# Altium PCB E-Field-Near-Probe.PcbDoc
Units mil, origin at the board's own origin, x right, y up, seen from the top; angles counter-clockwise.
Board outline 6000 x 4000 mil, 4 copper layers (Top Layer, Layer 1, Layer 2, Bottom Layer), stack 61.811 mil thick; 1 components, 2 nets, 5 pads, 446 vias.
Unrouted connection lines stored in the file: 445.
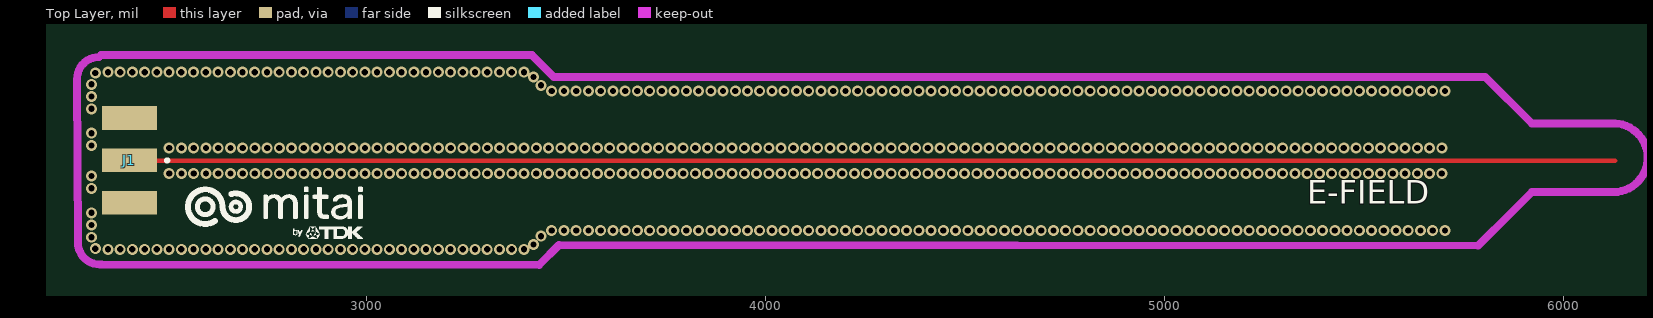
[diagram p0: Top Layer view]
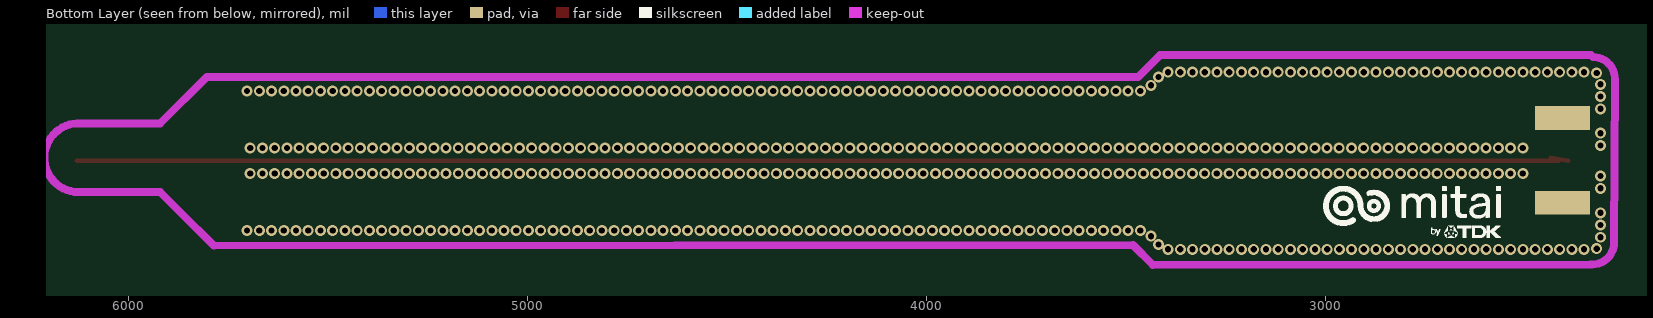
[diagram p1: Bottom Layer view, seen from below]

## Layer stack, top to bottom
Top Solder: solder mask 0.5, Solder Resist, Dk 3.5
Top Layer: signal copper 1.378
Dielectric 2: prepreg 7.874, PP-006, Dk 4.1
Layer 1: signal copper 0.689
Dielectric 1: dielectric 41.9291, FR-4, Dk 4.8
Layer 2: signal copper 0.689
Dielectric 3: prepreg 7.874, PP-006, Dk 4.1
Bottom Layer: signal copper 1.378
Bottom Solder: solder mask 0.5, Solder Resist, Dk 3.5

## Board outline
1000,1000 7000,1000 7000,5000 1000,5000

## Design rules (kind name [scope] priority, off if disabled: settings)
Clearance [All] p1: gap=10 ignorepadtopadclearanceinfootprint=FALSE except(0: Arc-Hole Track-Hole SMDPad-Hole THPad-Hole Via-Hole Fill-Hole Poly-Hole Region-Hole Text-Hole)
PolygonConnect [All] p1: connectstyle=Relief reliefconductorwidth=10 reliefentries=4 polygonreliefangle="90 Angle" airgapwidth=10
RoutingVias [All] p1: holewidth=28 width=50 viastyle="Through Hole" minholewidth=28 minwidth=50 maxholewidth=28 maxwidth=50
SolderMaskExpansion [All] p1: expansion=4 istentingtop=FALSE
Width [All] p1: maxlimit=10 minlimit=10 preferedwidth=10
30 further rules are at their usual default settings.

## Components (designator, comment, footprint, x,y, rotation, side; value= is the part's Value field where it differs from the comment)
J1 "CON-SMA-EDGE-S" RFSOLUTIONS_CON-SMA-EDGE-S 2405,3468.7 r0 top

## Footprints (in the part's own frame and the unit in brackets; to place one, negate y for a bottom-side part, rotate by r counter-clockwise, add the part's x,y. Pads: shape width x height; smd on the part's side, far side on the other; paste and mask are expansions set on the pad)
RFSOLUTIONS_CON-SMA-EDGE-S [mm]
  rect 3.5x1.5 smd: 1(0,0) G1(0,2.7) G2(0,-2.7)
  rect 3.5x1.5 smd far side: G3(0,2.7) G4(0,-2.7)
  silkscreen extent 2.3,-0.1 2.5,0.1, body extent -11.27,-3.17 2.06,3.17, height 3.55

## Part data
J1: "SMA Connector Jack, Female Socket - Board Edge, End Launch Solder", Package=None, Check_prices=https://www.snapeda.com/parts/CON-SMA-EDGE-S/RF+Solutions/view-part/?ref=eda, Digi-Key_Part_Number=CON-SMA-EDGE-S-ND, MF="RF Solutions", MP=CON-SMA-EDGE-S, Purchase-URL=https://pricing.snapeda.com/search/part/CON-SMA-EDGE-S/?ref=eda, SnapEDA_Link=https://www.snapeda.com/parts/CON-SMA-EDGE-S/RF+Solutions/view-part/?ref=snap

## Via types
v1: diameter 27.56, hole 15.75, Top Layer to Bottom Layer, tented both sides, 446 vias

## Nets (pads, with @x,y where several pads share a name; then routed paths per layer and width w, separated by ;. In a path a pad name is that pad's centre, name@x,y a point inside that pad or via, vN(x,y) a via of type N, cw(c..) or ccw(c..) an arc to the next point about the centre after c; other vN are vias at no path point)
GND: J1.G1 J1.G2 J1.G3 J1.G4
  other v1: 2351,3245.84 2381.67,3245.84 2412.33,3245.84 2443,3245.84 2473.66,3245.84 2504.33,3245.84 2535,3245.84 2565.66,3245.84 2596.33,3245.84 2627,3245.84 2657.66,3245.84 2688.33,3245.84 2719,3245.84 2749.66,3245.84 2780.33,3245.84 2811,3245.84 2841.66,3245.84 2872.33,3245.84 2903,3245.84 2933.66,3245.84 2964.33,3245.84 2995,3245.84 3025.66,3245.84 3056.33,3245.84 3087,3245.84 3117.66,3245.84 3148.33,3245.84 3148.33,3245.84 3179,3245.84 3209.66,3245.84 3240.33,3245.84 3271,3245.84 3301.66,3245.84 3332.33,3245.84 3363,3245.84 3393.66,3245.84 2319.48,3247.56 3417.66,3257.84 2309.66,3276.18 3436.66,3278.84 3463.33,3292.84 3494,3292.84 3524.66,3292.84 3555.33,3292.84 3586,3292.84 3616.66,3292.84 3647.33,3292.84 3678,3292.84 3708.66,3292.84 3739.33,3292.84 3770,3292.84 3800.66,3292.84 3831.33,3292.84 3861.99,3292.84 3892.66,3292.84 3923.33,3292.84 3953.99,3292.84 3984.66,3292.84 4015.33,3292.84 4045.99,3292.84 4076.66,3292.84 4107.33,3292.84 4137.99,3292.84 4168.66,3292.84 4199.33,3292.84 4229.99,3292.84 4260.66,3292.84 4291.33,3292.84 4321.99,3292.84 4352.66,3292.84 4383.33,3292.84 4413.99,3292.84 4444.66,3292.84 4475.33,3292.84 4505.99,3292.84 4536.66,3292.84 4567.33,3292.84 4597.99,3292.84 4628.66,3292.84 4659.33,3292.84 4689.99,3292.84 4720.66,3292.84 4751.33,3292.84 4781.99,3292.84 4812.66,3292.84 4843.33,3292.84 4873.99,3292.84 4904.66,3292.84 4935.33,3292.84 4965.99,3292.84 4996.66,3292.84 5027.33,3292.84 5057.99,3292.84 5088.66,3292.84 5119.33,3292.84 5149.99,3292.84 5180.66,3292.84 5211.33,3292.84 5241.99,3292.84 5272.66,3292.84 5303.33,3292.84 5333.99,3292.84 5364.66,3292.84 5395.32,3292.84 5425.99,3292.84 5456.66,3292.84 5487.32,3292.84 5517.99,3292.84 5548.66,3292.84 5579.32,3292.84 5609.99,3292.84 5640.66,3292.84 5671.32,3292.84 5701.99,3292.84 2309.66,3306.84 2309.66,3337.51 2309.66,3398.84 2309.66,3429.51 2504.66,3435.84 2535.33,3435.84 2566,3435.84 2596.66,3435.84 2627.33,3435.84 2658,3435.84 2688.66,3435.84 2719.33,3435.84 2750,3435.84 2780.66,3435.84 2811.33,3435.84 2842,3435.84 2872.66,3435.84 2903.33,3435.84 2934,3435.84 2964.66,3435.84 2995.33,3435.84 3026,3435.84 3056.66,3435.84 3087.33,3435.84 3118,3435.84 3148.66,3435.84 3179.33,3435.84 3210,3435.84 3240.66,3435.84 3271.33,3435.84 3302,3435.84 3332.66,3435.84 3363.33,3435.84 3394,3435.84 3424.66,3435.84 3455.33,3435.84 3486,3435.84 3516.66,3435.84 3547.33,3435.84 3578,3435.84 3608.66,3435.84 3639.33,3435.84 3670,3435.84 3700.66,3435.84 3731.33,3435.84 3762,3435.84 3792.66,3435.84 3823.33,3435.84 3853.99,3435.84 3884.66,3435.84 3915.33,3435.84 3945.99,3435.84 3976.66,3435.84 4007.33,3435.84 4037.99,3435.84 4068.66,3435.84 4099.33,3435.84 4129.99,3435.84 4160.66,3435.84 4191.33,3435.84 4221.99,3435.84 4252.66,3435.84 4283.33,3435.84 4313.99,3435.84 4344.66,3435.84 4375.33,3435.84 4405.99,3435.84 4436.66,3435.84 4467.33,3435.84 4497.99,3435.84 4528.66,3435.84 4559.33,3435.84 4589.99,3435.84 4620.66,3435.84 4651.33,3435.84 4681.99,3435.84 4712.66,3435.84 4743.33,3435.84 4773.99,3435.84 4804.66,3435.84 4835.33,3435.84 4865.99,3435.84 4896.66,3435.84 4927.33,3435.84 4957.99,3435.84 4988.66,3435.84 5019.33,3435.84 5049.99,3435.84 5080.66,3435.84 5111.33,3435.84 5141.99,3435.84 5172.66,3435.84 5203.33,3435.84 5233.99,3435.84 5264.66,3435.84 5295.33,3435.84 5325.99,3435.84 5356.66,3435.84 5387.32,3435.84 5417.99,3435.84 5448.66,3435.84 5479.32,3435.84 5509.99,3435.84 5540.66,3435.84 5571.32,3435.84 5601.99,3435.84 5632.66,3435.84 5663.32,3435.84 5693.99,3435.84 2504.66,3499.84 2535.33,3499.84 2566,3499.84 2596.66,3499.84 2627.33,3499.84 2658,3499.84 2688.66,3499.84 2719.33,3499.84 2750,3499.84 2780.66,3499.84 2811.33,3499.84 2842,3499.84 2872.66,3499.84 2903.33,3499.84 2934,3499.84 2964.66,3499.84 2995.33,3499.84 3026,3499.84 3056.66,3499.84 3087.33,3499.84 3118,3499.84 3148.66,3499.84 3179.33,3499.84 3210,3499.84 3240.66,3499.84 3271.33,3499.84 3302,3499.84 3332.66,3499.84 3363.33,3499.84 3394,3499.84 3424.66,3499.84 3455.33,3499.84 3486,3499.84 3516.66,3499.84 3547.33,3499.84 3578,3499.84 3608.66,3499.84 3639.33,3499.84 3670,3499.84 3700.66,3499.84 3731.33,3499.84 3762,3499.84 3792.66,3499.84 3823.33,3499.84 3853.99,3499.84 3884.66,3499.84 3915.33,3499.84 3945.99,3499.84 3976.66,3499.84 4007.33,3499.84 4037.99,3499.84 4068.66,3499.84 4099.33,3499.84 4129.99,3499.84 4160.66,3499.84 4191.33,3499.84 4221.99,3499.84 4252.66,3499.84 4283.33,3499.84 4313.99,3499.84 4344.66,3499.84 4375.33,3499.84 4405.99,3499.84 4436.66,3499.84 4467.33,3499.84 4497.99,3499.84 4528.66,3499.84 4559.33,3499.84 4589.99,3499.84 4620.66,3499.84 4651.33,3499.84 4681.99,3499.84 4712.66,3499.84 4743.33,3499.84 4773.99,3499.84 4804.66,3499.84 4835.33,3499.84 4865.99,3499.84 4896.66,3499.84 4927.33,3499.84 4957.99,3499.84 4988.66,3499.84 5019.33,3499.84 5049.99,3499.84 5080.66,3499.84 5111.33,3499.84 5141.99,3499.84 5172.66,3499.84 5203.33,3499.84 5233.99,3499.84 5264.66,3499.84 5295.33,3499.84 5325.99,3499.84 5356.66,3499.84 5387.32,3499.84 5417.99,3499.84 5448.66,3499.84 5479.32,3499.84 5509.99,3499.84 5540.66,3499.84 5571.32,3499.84 5601.99,3499.84 5632.66,3499.84 5663.32,3499.84 5693.99,3499.84 2309.66,3506.18 2309.66,3536.84 2309.66,3598.18 2309.66,3628.84 3463.33,3642.84 3494,3642.84 3524.66,3642.84 3555.33,3642.84 3586,3642.84 3616.66,3642.84 3647.33,3642.84 3678,3642.84 3708.66,3642.84 3739.33,3642.84 3770,3642.84 3800.66,3642.84 3831.33,3642.84 3861.99,3642.84 3892.66,3642.84 3923.33,3642.84 3953.99,3642.84 3984.66,3642.84 4015.33,3642.84 4045.99,3642.84 4076.66,3642.84 4107.33,3642.84 4137.99,3642.84 4168.66,3642.84 4199.33,3642.84 4229.99,3642.84 4260.66,3642.84 4291.33,3642.84 4321.99,3642.84 4352.66,3642.84 4383.33,3642.84 4413.99,3642.84 4444.66,3642.84 4475.33,3642.84 4505.99,3642.84 4536.66,3642.84 4567.33,3642.84 4597.99,3642.84 4628.66,3642.84 4659.33,3642.84 4689.99,3642.84 4720.66,3642.84 4751.33,3642.84 4781.99,3642.84 4812.66,3642.84 4843.33,3642.84 4873.99,3642.84 4904.66,3642.84 4935.33,3642.84 4965.99,3642.84 4996.66,3642.84 5027.33,3642.84 5057.99,3642.84 5088.66,3642.84 5119.33,3642.84 5149.99,3642.84 5180.66,3642.84 5211.33,3642.84 5241.99,3642.84 5272.66,3642.84 5303.33,3642.84 5333.99,3642.84 5364.66,3642.84 5395.32,3642.84 5425.99,3642.84 5456.66,3642.84 5487.32,3642.84 5517.99,3642.84 5548.66,3642.84 5579.32,3642.84 5609.99,3642.84 5640.66,3642.84 5671.32,3642.84 5701.99,3642.84 3436.66,3656.84 2309.66,3659.51 3417.66,3677.84 2319.48,3687.56 2351,3689.84 2381.67,3689.84 2412.33,3689.84 2443,3689.84 2473.66,3689.84 2504.33,3689.84 2535,3689.84 2565.66,3689.84 2596.33,3689.84 2627,3689.84 2657.66,3689.84 2688.33,3689.84 2719,3689.84 2749.66,3689.84 2780.33,3689.84 2811,3689.84 2841.66,3689.84 2872.33,3689.84 2903,3689.84 2933.66,3689.84 2964.33,3689.84 2995,3689.84 3025.66,3689.84 3056.33,3689.84 3087,3689.84 3117.66,3689.84 3148.33,3689.84 3148.33,3689.84 3179,3689.84 3209.66,3689.84 3240.33,3689.84 3271,3689.84 3301.66,3689.84 3332.33,3689.84 3363,3689.84 3393.66,3689.84
PROBE: J1.1 | length 44.4
  Top Layer w11.55: J1.1@2391.13,3467.84 J1.1@2435,3475
copper on no net: | length 3713.6
  Top Layer w11.55: 2414.48,3467.84 5800.66,3467.84 6128.06,3467.84

## Keep-outs
Keep-Out Layer:
  lines w19.68: 2273.63,3667.81 2275.66,3267.88 ; 2273.64,3672.81 cw(c2328.65,3672.81) 2328.65,3727.82 ; 2275.66,3262.88 ccw(c2330.67,3262.88) 2330.67,3207.86 ; 2333.65,3732.82 3413.57,3732.82 3468.45,3677.94 5803.12,3677.94 5919.48,3561.58 6128.06,3561.58 ; 2335.67,3207.86 3431.91,3207 3481.65,3256.65 5784.77,3254.83 5825,3295 ; 5803.12,3272.74 5919.48,3389.1 ; 5919.48,3389.24 6128.06,3389.24
  lines w19.69: 6128.06,3561.58 cw(c6123.79,3475.48) 6135,3390

## Silkscreen, mask and mechanical layers (free items; w line width, h text height)
Top Overlay:
  drawing of 16 lines, arcs and shapes, not listed
  text "E-FIELD" at 5356.84,3339.52 h100
Bottom Overlay:
  drawing of 16 lines, arcs and shapes, not listed